# Altium PCB Universal receiver.PcbDoc
Units mil, origin at the board's own origin, x right, y up, seen from the top; angles counter-clockwise.
Board outline 6000 x 4000 mil, 2 copper layers (Top Layer, Bottom Layer); 23 components, 18 nets, 72 pads, 0 vias.
Unrouted connection lines stored in the file: 44.
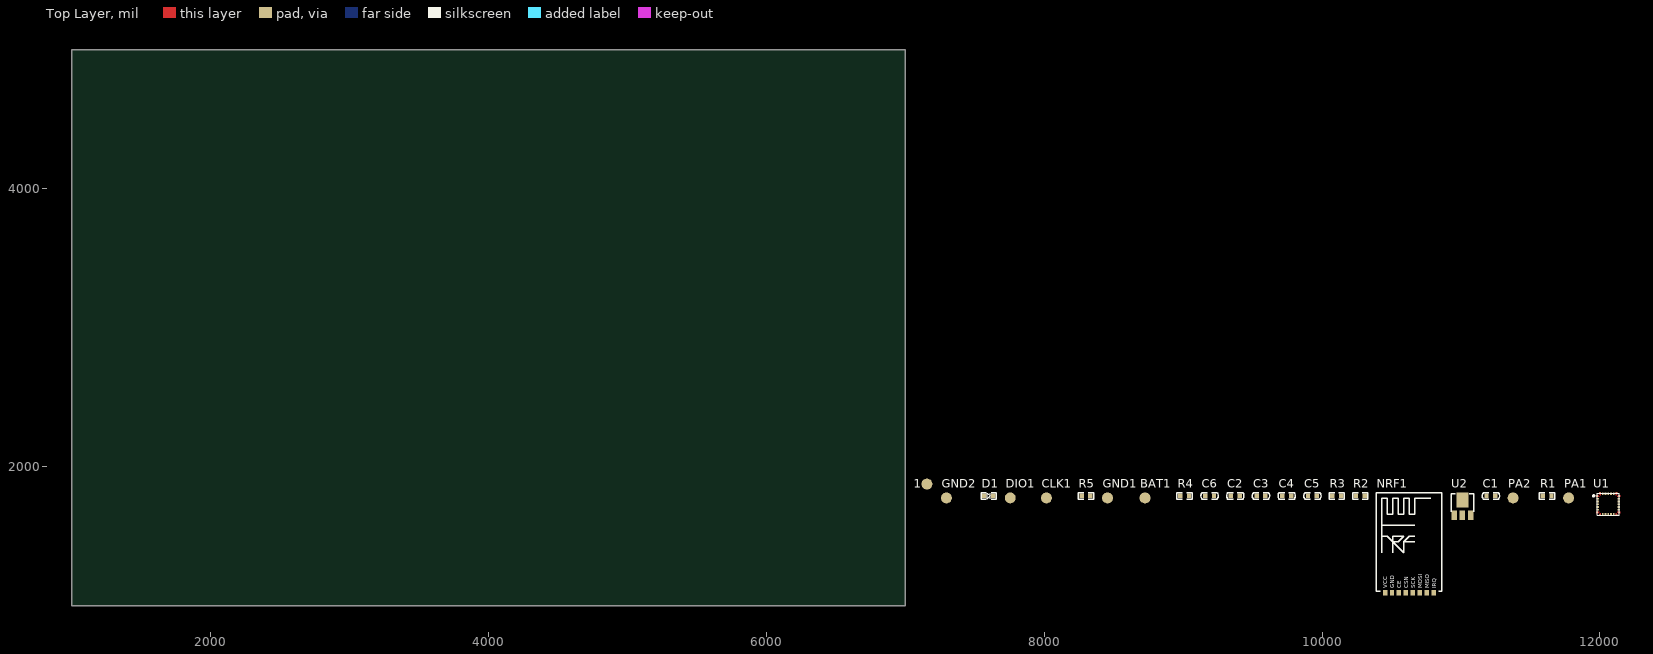
[diagram p0: Top Layer view]
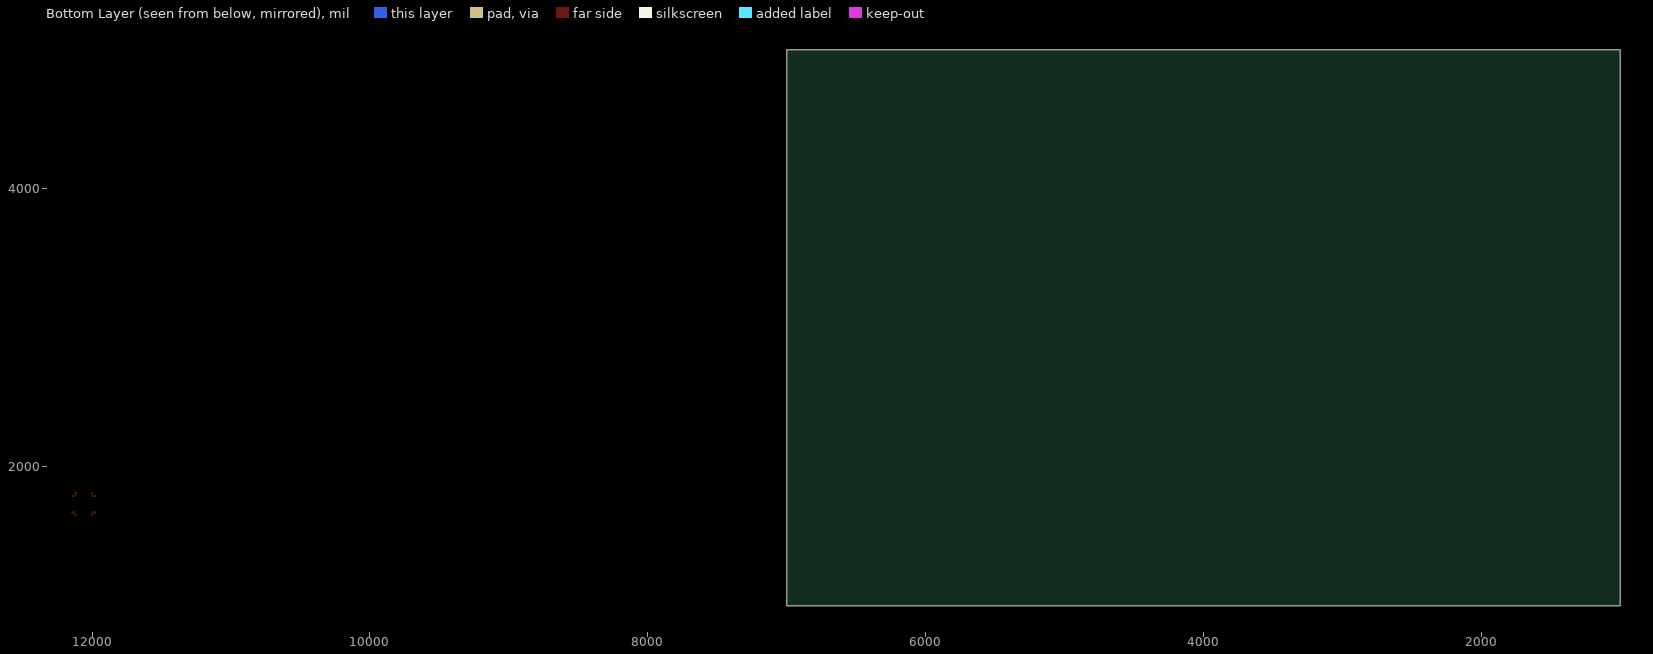
[diagram p1: Bottom Layer view, seen from below]

## Layer stack, top to bottom
Top Solder: solder mask 0.4, Solder Resist, Dk 3.5
Top Layer: signal copper 1.4
Dielectric 1: dielectric 12.6, FR-4, Dk 4.8
Bottom Layer: signal copper 1.4
Bottom Solder: solder mask 0.4, Solder Resist, Dk 3.5

## Board outline
1000,1000 7000,1000 7000,5000 1000,5000

## Design rules (kind name [scope] priority, off if disabled: settings)
Clearance [All] p1: gap=10 ignorepadtopadclearanceinfootprint=FALSE except(0: Arc-Hole Track-Hole SMDPad-Hole THPad-Hole Via-Hole Fill-Hole Poly-Hole Region-Hole Text-Hole)
PolygonConnect [All] p1: connectstyle=Relief reliefconductorwidth=10 reliefentries=4 polygonreliefangle="90 Angle" airgapwidth=10
RoomDefinition "Universal receiver" [InComponentClass('Universal receiver')] p1: confinementstyle=ConfineIn formatcopy=TRUE lockcomponents=FALSE outline 7045,1065 12155,1065 12155,1925 7045,1925
RoutingVias [All] p1: holewidth=28 width=50 viastyle="Through Hole" minholewidth=28 minwidth=50 maxholewidth=28 maxwidth=50
SolderMaskExpansion [All] p1: expansion=4
Width [All] p1: maxlimit=10 minlimit=10 preferedwidth=10
30 further rules are at their usual default settings.

## Components (designator, comment, footprint, x,y, rotation, side; value= is the part's Value field where it differs from the comment)
1 "3V3" Pad_B 7155,1875 r90 top
BAT1 "BAT" Pad_B 8725,1775 r90 top
C1 "4.7uF" 电容_C0603 11215,1790 r0 top
C2 "4.7uF" 电容_C0603 9375,1790 r0 top
C3 "4.7uF" 电容_C0603 9560,1790 r0 top
C4 "4.7uF" 电容_C0603 9745,1790 r0 top
C5 "4.7uF" 电容_C0603 9930,1790 r0 top
C6 "4.7uF" 电容_C0603 9190,1790 r0 top
CLK1 "CLK" Pad_B 8015,1775 r90 top
D1 "red" LED_0603 7600,1790 r0 top
DIO1 "DIO" Pad_B 7755,1775 r90 top
GND1 "GND" Pad_B 8455,1775 r90 top
GND2 "GND" Pad_B 7295,1775 r90 top
NRF1 "NRF_1" NRF-1 10390,1105 r0 top
PA1 "PA2" Pad_B 11775,1775 r0 top
PA2 "PA3" Pad_B 11375,1775 r0 top
R1 "10K" 电阻_R0603 11620,1790 r0 top
R2 "10K" 电阻_R0603 10275,1790 r0 top
R3 "1R" 电阻_R0603 10105,1790 r0 top
R4 "10K" 电阻_R0603 9010,1790 r0 top
R5 "100" 电阻_R0603 8300,1790 r0 top
U1 "STM32F031G6U6" ST主控_UFQFPN28 12060,1730 r0 top
U2 "AMS1117" 稳压芯片_SOT-89 10950,1650 r0 top

## Footprints (in the part's own frame and the unit in brackets; to place one, negate y for a bottom-side part, rotate by r counter-clockwise, add the part's x,y. Pads: shape width x height; smd on the part's side, far side on the other; paste and mask are expansions set on the pad)
LED_0603 [mm]
  rect 0.8x0.8 smd paste-0.1: A(-0.8,0) K(0.8,0)
  silkscreen extent -1.4,-0.6 1.4,0.6, body extent -0.8,-0.4 0.82,0.4, height 0.6
NRF-1 [mm]
  rect 0.813x1 smd: 1(1.6,-0.275) 2(2.87,-0.275) 3(4.14,-0.275) 4(5.41,-0.275) 5(6.68,-0.275) 6(7.95,-0.275) 7(9.22,-0.275) 8(10.49,-0.275)
  silkscreen extent 0,0 12,18
Pad_B [mm]
  round 2 smd: 1(0,0)
ST主控_UFQFPN28 [mm]
  rect 0.3x0.3 smd: 1(-2.01,1.5) 7(-2,-1.5) 8(-1.5,-2) 14(1.5,-2) 15(2,-1.5) 21(2,1.5) 22(1.5,2) 28(-1.5,2)
  rect 0.5x0.3 smd: 2(-1.9,1) 3(-1.9,0.5) 4(-1.9,0) 5(-1.9,-0.5) 6(-1.9,-1) 16(1.9,-1) 17(1.9,-0.5) 18(1.9,0) 19(1.9,0.5) 20(1.9,1)
  rect 0.3x0.5 smd: 9(-1,-1.9) 10(-0.5,-1.9) 11(0,-1.9) 12(0.5,-1.9) 13(1,-1.9) 23(1,1.9) 24(0.5,1.9) 25(0,1.9) 26(-0.5,1.9) 27(-1,1.9)
  Top Layer region: -1.65,1.35 -1.65,1.5 -1.8,1.65 -2.15,1.65 -2.15,1.35 -1.65,1.35
  Top Layer region: -2.15,-1.35 -1.65,-1.35 -1.65,-1.5 -1.8,-1.65 -2.15,-1.65 -2.15,-1.35
  Top Layer region: -1.35,-2.15 -1.351,-1.65 -1.501,-1.65 -1.651,-1.801 -1.65,-2.151 -1.35,-2.15
  Top Layer region: 1.35,-1.65 1.5,-1.65 1.65,-1.8 1.65,-2.15 1.35,-2.15 1.35,-1.65
  Top Layer region: 1.65,-1.35 1.65,-1.5 1.8,-1.65 2.15,-1.65 2.15,-1.35 1.65,-1.35
  Top Layer region: -1.35,1.65 -1.5,1.65 -1.65,1.8 -1.65,2.15 -1.35,2.15 -1.35,1.65
  Top Layer region: 1.35,1.65 1.5,1.65 1.65,1.8 1.65,2.15 1.35,2.15 1.35,1.65
  Top Layer region: 1.65,1.35 1.65,1.5 1.8,1.65 2.15,1.65 2.15,1.35 1.65,1.35
  silkscreen extent -2.82,-2 2,2
电容_C0603 [mm]
  rect 0.8x0.8 smd: 1(-0.8,0) 2(0.8,0)
  silkscreen extent -1.58,-0.6 1.58,0.6, body extent -0.8,-0.4 0.8,0.4, height 0.3
电阻_R0603 [mm]
  rect 0.8x0.8 smd: 1(-0.8,0) 2(0.8,0)
  silkscreen extent -1.4,-0.6 1.4,0.6, body extent -0.8,-0.4 0.8,0.4, height 0.45
稳压芯片_SOT-89 [mil]
  rect 40x70 smd: 1(0,0) 2(60,0) 3(120,0)
  rect 86.61x110.24 smd: 2(60,110)
  silkscreen extent -20,25 140,155, body extent -28,-21 149,148, height 59

## Part data
1 BAT1 CLK1 DIO1 GND1 GND2 PA1 PA2: library part Pad, _Comma=,, _Funcyusa=Test, _Name=Pad
  1: _Remarks=3V3, _Specification=Pad,Test,3V3
  BAT1: _Remarks=BAT, _Specification=Pad,Test,BAT
  CLK1: _Remarks=CLK, _Specification=Pad,Test,CLK
  DIO1: _Remarks=DIO, _Specification=Pad,Test,DIO
  GND1 GND2: _Remarks=GND, _Specification=Pad,Test,GND
  PA1: _Remarks=PA2, _Specification=Pad,Test,PA2
  PA2: _Remarks=PA3, _Specification=Pad,Test,PA3
C1 C2 C3 C4 C5 C6: library part cap, C=4.7uF, U=50V, 参数=Cap,0805,X7R,104K,50V,125C,±10%
D1: library part LED, 参数=LED,0603,Red
R1 R2 R3 R4 R5: library part Res, P=1/8W, 参数=Res,0805,0R,±1%,1/8W,100ppm,155C
  R1 R2 R4: R=10K
  R3: R=1R
  R5: R=100

## Nets (pads, with @x,y where several pads share a name; then routed paths per layer and width w, separated by ;. In a path a pad name is that pad's centre, name@x,y a point inside that pad or via, vN(x,y) a via of type N, cw(c..) or ccw(c..) an arc to the next point about the centre after c; other vN are vias at no path point)
3V3: 1.1 C3.2 C4.2 C5.2 C6.2 NRF1.1 R1.2 U1.5 U1.17 U2.2
BAT: BAT1.1 R2.2 R3.1
BAT_DET: R2.1 R4.2 U1.7
GND: C1.1 C2.1 C3.1 C4.1 C5.1 C6.1 D1.K GND1.1 GND2.1 NRF1.2 R4.1 U1.1 U1.2 U1.16 U2.1
LED: R5.1 U1.6
NetC2_2: C2.2 R3.2 U2.3
NetD1_A: D1.A R5.2
NetPA1_1: PA1.1 U1.8
NetPA2_1: PA2.1 U1.9
NRF_CE: NRF1.3 U1.28
NRF_CSN: NRF1.4 U1.27
NRF_IRQ: NRF1.8 U1.23
NRF_MISO: NRF1.7 U1.24
NRF_MOSI: NRF1.6 U1.25
NRF_SCK: NRF1.5 U1.26
NRST: C1.2 R1.1 U1.4
SWCLK: CLK1.1 U1.22
SWDIO: DIO1.1 U1.21
pads on no net: U1.3 U1.10 U1.11 U1.12 U1.13 U1.14 U1.15 U1.18 U1.19 U1.20

## Text inside footprints (layer, text, board x,y; h text height)
NRF1: Top Overlay "IRQ" at 10820,1125 h30 r90; Top Overlay "MISO" at 10770,1125 h30 r90; Top Overlay "MOSI" at 10720,1125 h30 r90; Top Overlay "SCK" at 10670,1125 h30 r90; Top Overlay "CSN" at 10620,1125 h30 r90; Top Overlay "CE" at 10570,1125 h30 r90; Top Overlay "GND" at 10520,1125 h30 r90; Top Overlay "VCC" at 10470,1125 h30 r90